# Altium PCB Metis 2023 (PCB) - Shasi.PcbDoc
Units mm, origin at the board's own origin, x right, y up, seen from the top; angles counter-clockwise.
Board outline 180.8 x 171.08 mm, 2 copper layers (Top Layer, Bottom Layer); 98 components, 39 nets, 279 pads, 7 vias.
Unrouted connection lines stored in the file: 16.
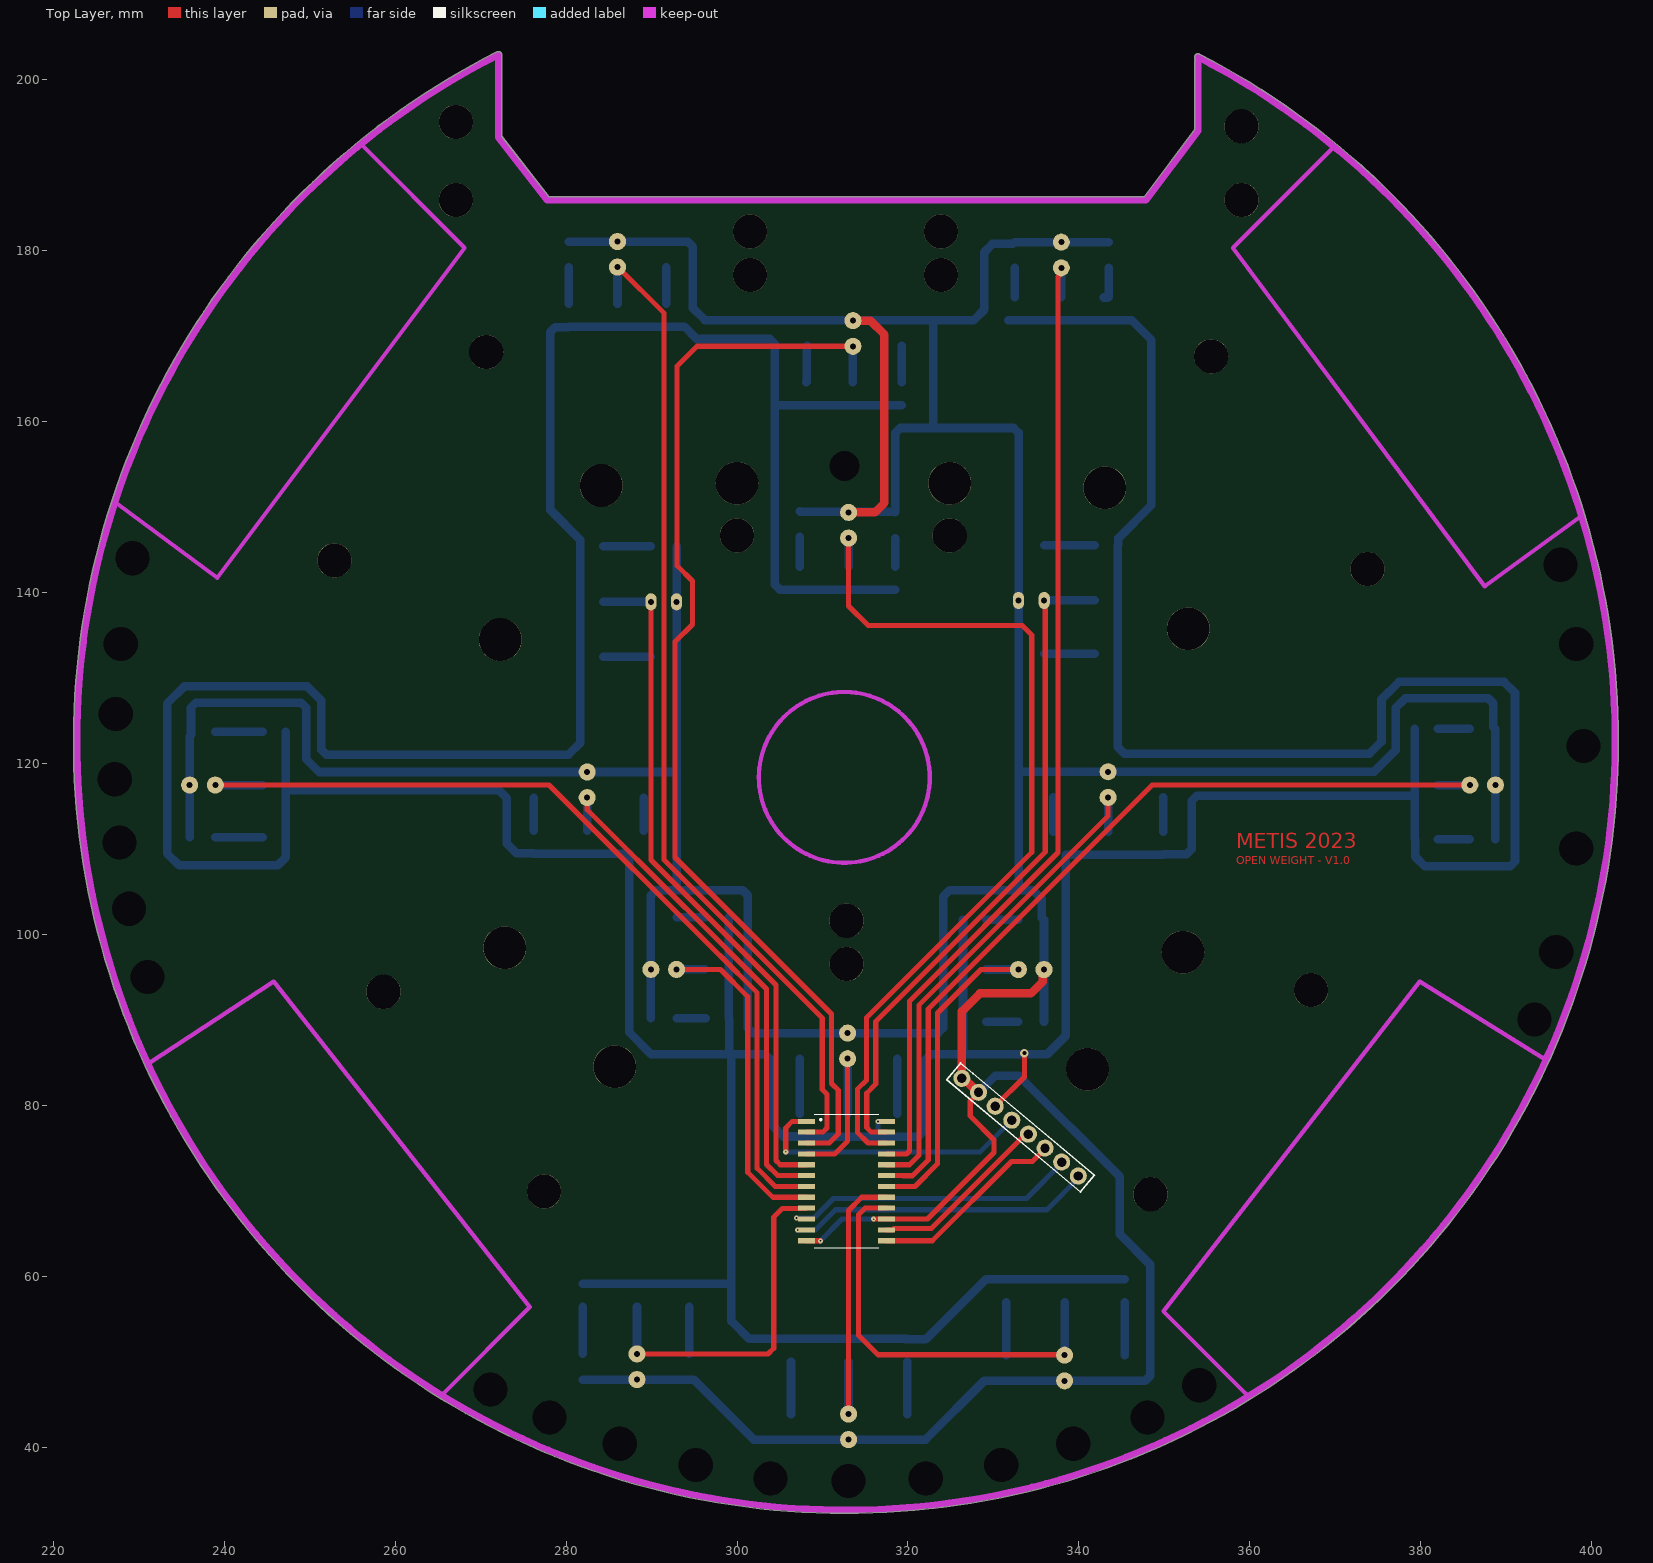
[diagram p0: Top Layer view]
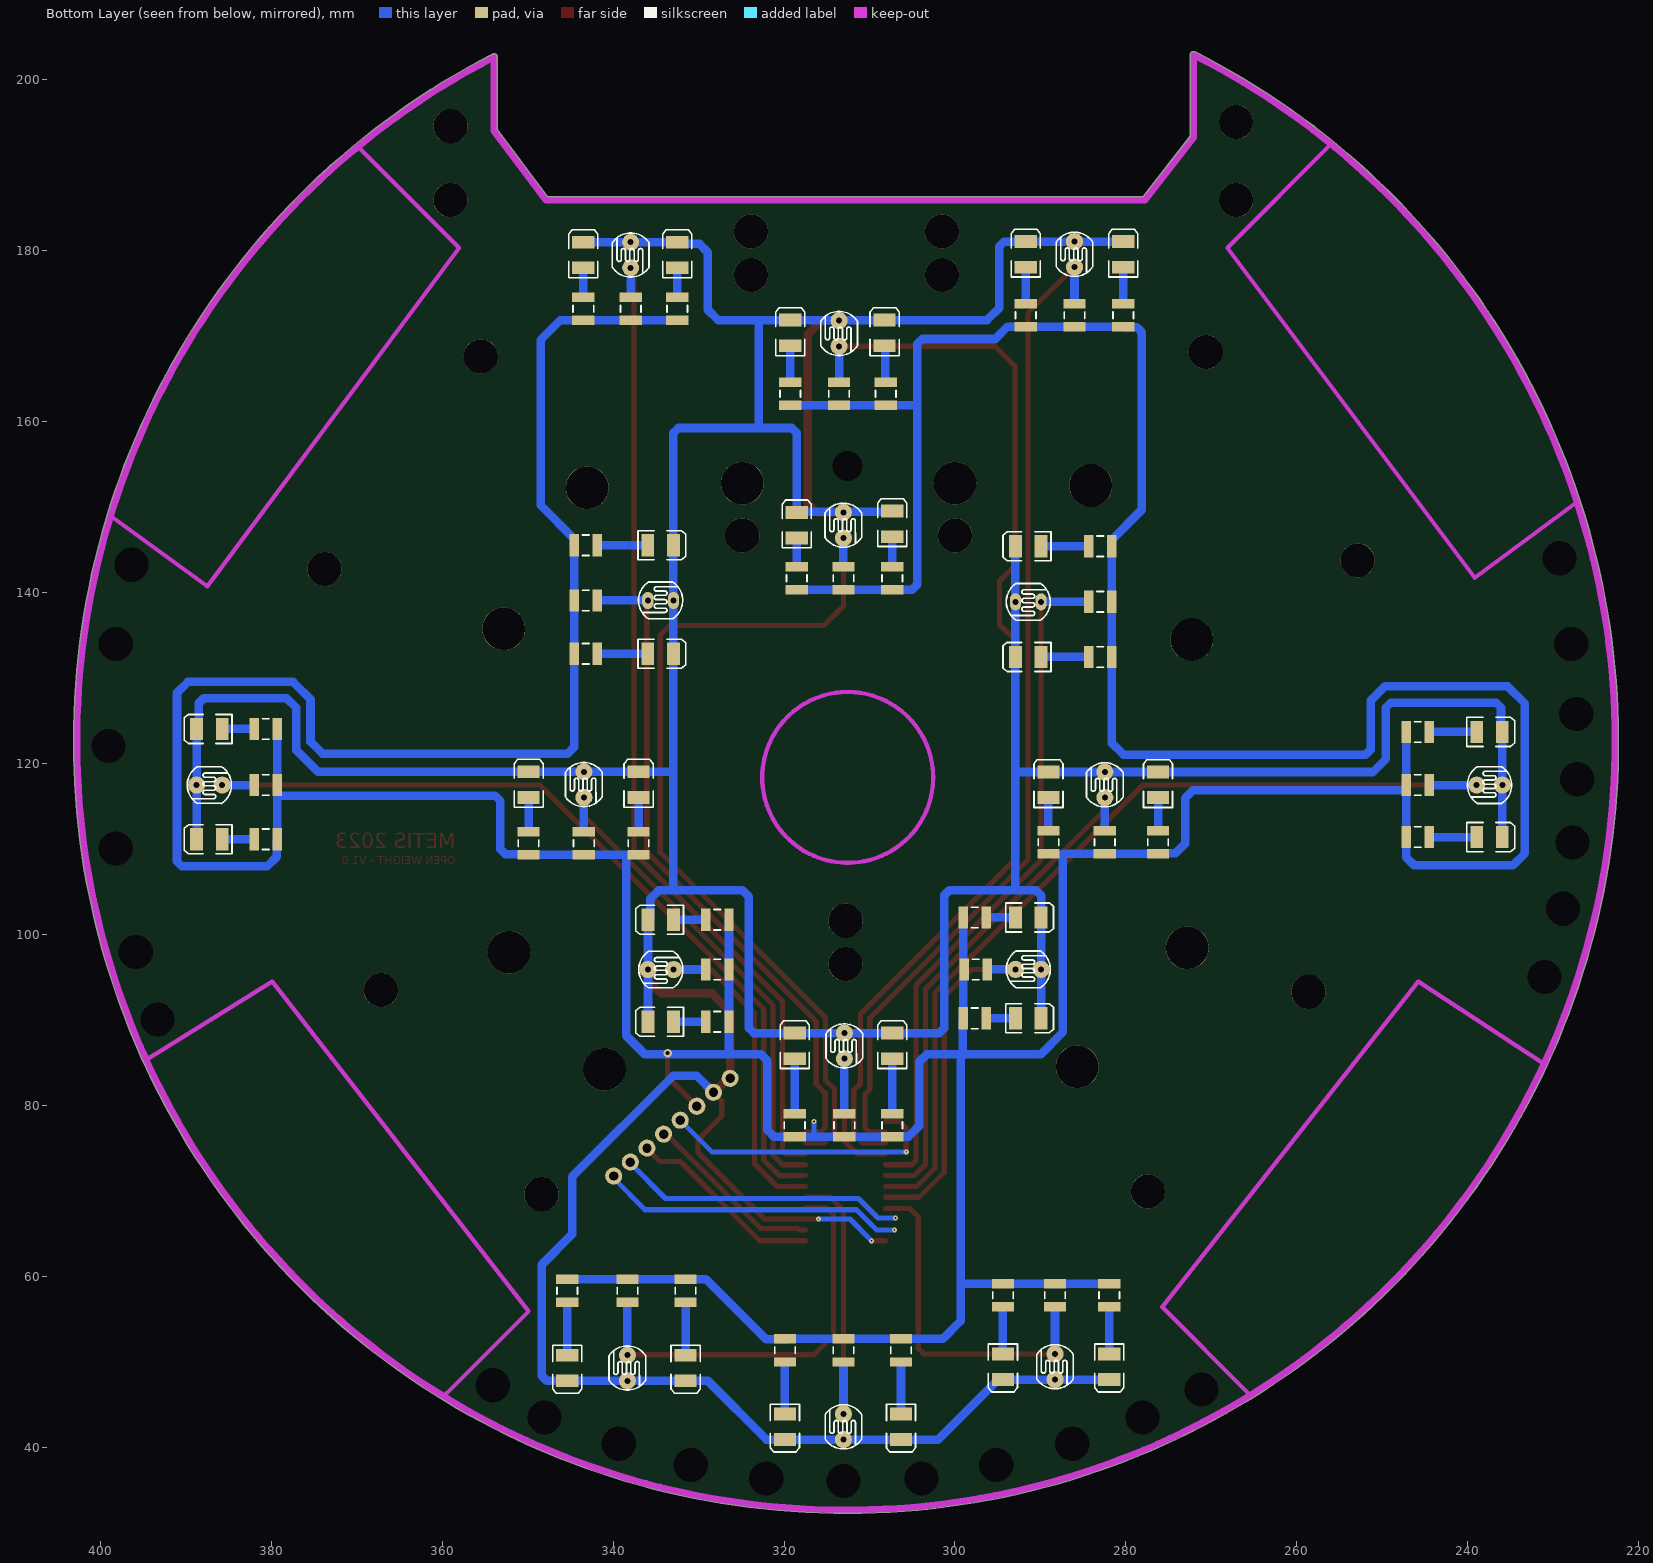
[diagram p1: Bottom Layer view, seen from below]

## Layer stack, top to bottom
Top Solder: solder mask 0.0102, Solder Resist, Dk 3.5
Top Layer: signal copper 0.0356
Dielectric 1: dielectric 0.32, FR-4, Dk 4.8
Bottom Layer: signal copper 0.0356
Bottom Solder: solder mask 0.0102, Solder Resist, Dk 3.5

## Board outline
272.463,193.399 277.959,186.328 347.667,186.328 353.563,194.189 353.563,202.184 cw(c353.963,202.184) 353.628,202.403 cw(c353.942,202.651) 354.126,203.007 cw(c312.745,122.634) 403.145,122.634 cw(c312.745,122.634) 271.88,203.27 cw(c272.062,202.914) 272.463,202.914

## Design rules (kind name [scope] priority, off if disabled: settings)
Clearance [All] p1: gap=0.254 ignorepadtopadclearanceinfootprint=FALSE except(0: Arc-Hole Track-Hole SMDPad-Hole THPad-Hole Via-Hole Fill-Hole Poly-Hole Region-Hole Text-Hole; 0.1: Arc-Via Track-Via; 0.5: Arc-Arc Arc-Track Arc-SMDPad Arc-THPad Arc-Fill Arc-Poly Arc-Region Arc-Text Track-Track Track-SMDPad Track-THPad Track-Fill Track-Poly Track-Region Track-Text)
PolygonConnect [All] p1: connectstyle=Relief reliefconductorwidth=0.254 reliefentries=4 polygonreliefangle="90 Angle" airgapwidth=0.254
RoutingVias [All] p1: holewidth=0.711 width=1.27 viastyle="Through Hole" minholewidth=0.1 minwidth=0.1 maxholewidth=10 maxwidth=10
SolderMaskExpansion [All] p1: expansion=0.102 istentingtop=FALSE
Width [All] p1: maxlimit=10 minlimit=0.1 preferedwidth=0.254
30 further rules are at their usual default settings.

## Classes and differential pairs
component class "Metis 2023 (Schematic) - Shasi": R2 R4 R5 R6 R7 R9 R10 R11 R12 R13 R15 R16 R17 R18 R19 R20 R21 R22 R23 R24 R25 R26 R27 R28 R29 R30 R31 R32

## Components (designator, comment, footprint, x,y, rotation, side; value= is the part's Value field where it differs from the comment)
* "" "HEADER 8" 326.308,83.148 r320 top
LED1 "" MY_LED_SMD 281.94,49.403 r270 bottom
LED1 "" MY_LED_SMD 294.386,49.403 r270 bottom
LED2 "" MY_LED_SMD 319.898,42.367 r270 bottom
LED2 "" MY_LED_SMD 306.309,42.367 r270 bottom
LED3 "" MY_LED_SMD 345.359,49.252 r270 bottom
LED3 "" MY_LED_SMD 331.516,49.252 r270 bottom
LED4 "" MY_LED_SMD 387.247,124.037 r0 bottom
LED4 "" MY_LED_SMD 387.247,111.135 r0 bottom
LED5 "" MY_LED_SMD 332.486,179.502 r90 bottom
LED5 "" MY_LED_SMD 343.481,179.502 r90 bottom
LED6 "" MY_LED_SMD 308.229,170.378 r90 bottom
LED6 "" MY_LED_SMD 319.278,170.378 r90 bottom
LED7 "" MY_LED_SMD 291.719,179.578 r90 bottom
LED7 "" MY_LED_SMD 280.289,179.578 r90 bottom
LED8 "" MY_LED_SMD 237.439,123.693 r180 bottom
LED8 "" MY_LED_SMD 237.439,111.379 r180 bottom
LED9 "" MY_LED_SMD 307.325,86.946 r90 bottom
LED9 "" MY_LED_SMD 318.755,86.946 r90 bottom
LED10 "" MY_LED_SMD 337.017,117.526 r90 bottom
LED10 "" MY_LED_SMD 349.885,117.526 r90 bottom
LED11 "" MY_LED_SMD 334.44,132.842 r180 bottom
LED11 "" MY_LED_SMD 334.44,145.542 r180 bottom
LED12 "" MY_LED_SMD 291.414,101.981 r180 bottom
LED12 "" MY_LED_SMD 291.414,90.17 r180 bottom
LED13 "" MY_LED_SMD 291.416,132.461 r0 bottom
LED13 "" MY_LED_SMD 291.416,145.415 r0 bottom
LED14 "" MY_LED_SMD 334.415,101.712 r0 bottom
LED14 "" MY_LED_SMD 334.415,89.774 r0 bottom
LED15 "" MY_LED_SMD 307.34,148.039 r90 bottom
LED15 "" MY_LED_SMD 318.516,147.879 r90 bottom
LED16 "" MY_LED_SMD 289.052,117.499 r90 bottom
LED16 "" MY_LED_SMD 276.225,117.499 r90 bottom
R1 "" MY_RES_SMD_1206 281.94,57.785 r270 bottom
R1 "" MY_RES_SMD_1206 294.386,57.785 r270 bottom
R2 "" MY_RES_SMD_1206 245.825,117.475 r180 bottom
R3 "" MY_RES_SMD_1206 319.898,51.308 r270 bottom
R3 "" MY_RES_SMD_1206 306.309,51.308 r270 bottom
R4 "" MY_RES_SMD_1206 286.004,172.466 r90 bottom
R5 "" MY_RES_SMD_1206 345.359,58.293 r270 bottom
R5 "" MY_RES_SMD_1206 331.516,58.293 r270 bottom
R6 "" MY_RES_SMD_1206 313.558,163.281 r90 bottom
R7 "" MY_RES_SMD_1206 380.666,124.037 r0 bottom
R7 "" MY_RES_SMD_1206 380.666,111.135 r0 bottom
R8 "" MY_RES_SMD_1206 337.942,173.228 r90 bottom
R9 "" MY_RES_SMD_1206 332.486,173.228 r90 bottom
R9 "" MY_RES_SMD_1206 343.481,173.228 r90 bottom
R10 "" MY_RES_SMD_1206 380.666,117.475 r0 bottom
R11 "" MY_RES_SMD_1206 308.102,163.281 r90 bottom
R11 "" MY_RES_SMD_1206 319.278,163.281 r90 bottom
R12 "" MY_RES_SMD_1206 338.328,58.293 r270 bottom
R13 "" MY_RES_SMD_1206 291.719,172.466 r90 bottom
R13 "" MY_RES_SMD_1206 280.289,172.466 r90 bottom
R14 "" MY_RES_SMD_1206 313.04,51.308 r270 bottom
R15 "" MY_RES_SMD_1206 245.825,123.693 r180 bottom
R15 "" MY_RES_SMD_1206 245.825,111.379 r180 bottom
R16 "" MY_RES_SMD_1206 288.285,57.785 r270 bottom
R17 "" MY_RES_SMD_1206 307.325,77.644 r90 bottom
R17 "" MY_RES_SMD_1206 318.755,77.644 r90 bottom
R18 "" MY_RES_SMD_1206 313.05,141.685 r90 bottom
R19 "" MY_RES_SMD_1206 337.017,110.664 r90 bottom
R19 "" MY_RES_SMD_1206 349.885,110.664 r90 bottom
R20 "" MY_RES_SMD_1206 283.003,138.918 r0 bottom
R21 "" MY_RES_SMD_1206 343.201,132.842 r180 bottom
R21 "" MY_RES_SMD_1206 343.201,145.542 r180 bottom
R22 "" MY_RES_SMD_1206 282.458,110.791 r90 bottom
R23 "" MY_RES_SMD_1206 297.688,101.981 r180 bottom
R23 "" MY_RES_SMD_1206 297.688,90.17 r180 bottom
R24 "" MY_RES_SMD_1206 297.561,95.9 r180 bottom
R25 "" MY_RES_SMD_1206 283.003,132.461 r0 bottom
R25 "" MY_RES_SMD_1206 283.003,145.415 r0 bottom
R26 "" MY_RES_SMD_1206 312.938,77.644 r90 bottom
R27 "" MY_RES_SMD_1206 327.787,101.712 r0 bottom
R27 "" MY_RES_SMD_1206 327.787,89.774 r0 bottom
R28 "" MY_RES_SMD_1206 327.787,95.885 r0 bottom
R29 "" MY_RES_SMD_1206 307.34,141.685 r90 bottom
R29 "" MY_RES_SMD_1206 318.516,141.685 r90 bottom
R30 "" MY_RES_SMD_1206 343.423,110.664 r90 bottom
R31 "" MY_RES_SMD_1206 289.052,110.791 r90 bottom
R31 "" MY_RES_SMD_1206 276.225,110.791 r90 bottom
R32 "" MY_RES_SMD_1206 343.201,139.075 r180 bottom
U1 "" *SOIC-24_74HC4067(Primary) 312.801,71.12 r0 top locked
? "" PhotoCell#1 288.285,49.403 r90 bottom
? "" PhotoCell#1 313.04,42.367 r90 bottom
? "" PhotoCell#1 338.328,49.252 r90 bottom
? "" PhotoCell#1 387.247,117.475 r0 bottom
? "" PhotoCell#1 237.439,117.475 r180 bottom
? "" PhotoCell#1 282.458,117.499 r90 bottom
? "" PhotoCell#1 291.414,95.9 r180 bottom
? "" PhotoCell#1 312.938,86.946 r90 bottom
? "" PhotoCell#1 334.415,95.885 r0 bottom
? "" PhotoCell#1 343.423,117.526 r90 bottom
? "" PhotoCell#2 334.44,139.075 r180 bottom
? "" PhotoCell#2 291.416,138.918 r0 bottom
? "" PhotoCell#1 337.942,179.502 r90 bottom
? "" PhotoCell#1 313.05,147.879 r90 bottom
? "" PhotoCell#1 313.558,170.317 r90 bottom
? "" PhotoCell#1 286.004,179.578 r90 bottom

## Footprints (in the part's own frame and the unit in brackets; to place one, negate y for a bottom-side part, rotate by r counter-clockwise, add the part's x,y. Pads: shape width x height; smd on the part's side, far side on the other; paste and mask are expansions set on the pad)
*SOIC-24_74HC4067(Primary) [mm]
  rect 2x0.6 smd: P1(-4.7,7) P2(-4.7,5.73) P3(-4.7,4.46) P4(-4.7,3.19) P5(-4.7,1.92) P6(-4.7,0.65) P7(-4.7,-0.62) P8(-4.7,-1.89) P9(-4.7,-3.16) P10(-4.7,-4.43) P11(-4.7,-5.7) P12(-4.7,-6.97) P13(4.7,-6.97) P14(4.7,-5.7) P15(4.7,-4.43) P16(4.7,-3.16) P17(4.7,-1.89) P18(4.7,-0.62) P19(4.7,0.65) P20(4.7,1.92) P21(4.7,3.19) P22(4.7,4.46) P23(4.7,5.73) P24(4.7,7)
  silkscreen extent -3.8,-7.8 3.8,7.8
"HEADER 8" [mm]
  round 2 hole 1.1: 1(0,0) 2(2.54,0) 3(5.08,0) 4(7.62,0) 5(10.16,0) 6(12.7,0) 7(15.24,0) 8(17.78,0)
  silkscreen extent -1.27,-1.27 19.18,1.27
MY_LED_SMD [mm]
  rect 1.5x2.6 smd: 1(-1.5,0) 2(1.5,0)
  silkscreen extent -2.65,-1.7 2.95,1.7, body extent -1.51,-0.8 1.71,0.8, height 1.1
MY_RES_SMD_1206 [mm]
  rect 1.1x2.6 smd: 1(-1.35,0) 2(1.35,0)
  silkscreen extent -0.4,-1.2 0.4,1.2, body extent -1.52,-0.76 1.68,0.84, height 0.55
PhotoCell#1 [mm]
  round 2 hole 0.7: 1(-1.5,0) 2(1.5,0)
  silkscreen extent -2.58,-2.15 2.58,2.15, body extent -2.61,-2.16 2.61,2.14, height 2.44
PhotoCell#2 [mm]
  oval 1.3x2 hole 0.7: 1(-1.5,0) 2(1.5,0)
  silkscreen extent -2.58,-2.15 2.58,2.15, body extent -2.61,-2.16 2.61,2.14, height 2.44

## Part data
*: library part "Header 8"
LED1 LED1 LED2 LED2 LED3 LED3 LED4 LED4 LED5 LED5 LED6 LED6 LED7 LED7 LED8 LED8 LED9 LED9 LED10 LED10 LED11 LED11 LED12 LED12 LED13 LED13 LED14 LED14 LED15 LED15 LED16 LED16: library part "LED SMD"
R1 R1 R2 R3 R3 R4 R5 R5 R6 R7 R7 R8 R9 R9 R10 R11 R11 R12 R13 R13 R14 R15 R15 R16 R17 R17 R18 R19 R19 R20 R21 R21 R22 R23 R23 R24 R25 R25 R26 R27 R27 R28 R29 R29 R30 R31 R31 R32: library part "RES SMD 1206"
U1: library part 74HC4067, "Analog Switch/Analog Multiplexer Single 16:1 24-Pin SSOP T/R", Package=None, Availability="Not in stock", Check_prices=https://www.snapeda.com/parts/74HC4067/Nexperia/view-part/?ref=eda, MF=Nexperia, MP=74HC4067, Price=None, SnapEDA_Link=https://www.snapeda.com/parts/74HC4067/Nexperia/view-part/?ref=snap

## Free pads (board coordinates)
  round 0 hole 4: 1(227.161,118.156) 1(227.288,125.776) 1(227.711,110.744) 1(227.872,133.996) 1(228.854,102.997) 1(229.235,144.018) 1(231.013,94.996) 1(271.145,46.736) 1(278.056,43.462) 1(286.258,40.386) 1(295.155,37.906) 1(303.911,36.322) 1(313.035,36.027) 1(322.072,36.322) 1(330.915,37.906) 1(339.344,40.386) 1(348.014,43.462) 1(354.076,47.244) 1(393.319,90.043) 1(395.859,97.917) 1(396.367,143.256) 1(398.198,110.058) 1(398.198,133.996) 1(399.035,122.027)
  round 0 hole 3.5: 3(312.547,154.813)
  round 5 hole 5: 55(341.009,84.201) 74(272.81,98.425) 75(352.806,135.763) 76(285.674,84.515) 84(272.288,134.493) 91(343.027,152.273) 92(284.099,152.527) 100(352.185,97.917) 109(324.88,152.781) 110(299.988,152.781)
  round 4 hole 4: 60(258.624,93.279) 63(324.88,146.685) 64(299.988,146.685) 65(323.864,177.165) 66(301.512,177.165) 78(252.871,143.764) 79(355.487,167.64) 80(277.42,69.911) 81(348.375,69.596) 82(373.775,142.748) 83(367.171,93.472) 85(270.651,168.148) 86(267.095,185.928) 90(359.043,185.928) 111(323.864,182.245) 112(312.815,96.52) 113(312.815,101.6) 116(359.043,194.564) 117(301.512,182.245) 118(267.095,195.072)

## Via types
v1: diameter 0.6, hole 0.2, Top Layer to Bottom Layer, 6 vias
v2: diameter 1, hole 0.5, Top Layer to Bottom Layer, 1 vias

## Nets (pads, with @x,y where several pads share a name; then routed paths per layer and width w, separated by ;. In a path a pad name is that pad's centre, name@x,y a point inside that pad or via, vN(x,y) a via of type N, cw(c..) or ccw(c..) an arc to the next point about the centre after c; other vN are vias at no path point)
ADD0: *.7 U1.P10 | length 33.9
  Bottom Layer w0.6: v1(306.943,66.818) 309.007,66.818 311.277,69.088 333.853,69.088 *.7@338.118,73.352
ADD1: *.8 U1.P11 | length 35.6
  Bottom Layer w0.6: v1(307.086,65.405) 309.15,65.405 311.52,67.775 336.253,67.775 *.8@340.106,71.628
ADD2: *.5 U1.P14 | length 21.2
  Top Layer w0.6: U1.P14 318.201,65.42 318.371,65.59 322.733,65.59 333.761,76.618 *.5
ADD3: *.6 U1.P13 | length 23.1
  Top Layer w0.6: U1.P13 322.849,64.15 332.105,73.406 334.553,73.406 *.6@336.132,74.985
GND: *.1 *.2 ?.1@288.285,47.903 ?.1@313.04,40.867 ?.1@338.328,47.752 ?.2@235.939,117.475 ?.2@282.458,118.999 ?.2@286.004,181.078 ?.2@289.914,95.9 ?.2@292.916,138.918 ?.2@312.938,88.446 ?.2@313.05,149.379 ?.2@313.558,171.817 ?.2@332.94,139.075 ?.2@335.915,95.885 ?.2@337.942,181.002 ?.2@343.423,119.026 ?.2@388.747,117.475 LED1.2 LED2.2 LED3.2 LED4.2 LED5.2 LED6.2 LED7.2 LED8.2 LED9.2 LED10.2 LED11.2 LED12.2 LED13.2 LED14.2 LED15.2 LED16.2 U1.P12 U1.P15 | length 691.4
  Top Layer w0.6: U1.P12 309.738,64.15 v1(309.753,64.135) ; v1(315.976,66.675) 315.991,66.69 U1.P15 322.278,66.69 330.073,74.485 330.073,75.946 327.279,78.74 327.279,80.464 328.254,81.439 *.2
  Top Layer w1: ?.2@313.05,149.379 316.13,149.379 317.246,150.495 317.246,170.18 315.609,171.817 ?.2@313.558,171.817 ; *.1 *.1@326.308,83.373 ; *.2@327.93,81.751 *.1@326.308,83.373 ; ?.2@335.915,95.885 335.782,95.752 335.782,94.482 334.391,93.091 328.422,93.091 326.308,90.977 *.1@326.308,83.373
  Bottom Layer w0.6: v1(309.753,64.135) 312.293,66.675 v1(315.976,66.675)
  Bottom Layer w1: LED8.2@235.939,111.379 235.939,123.19 236.093,123.344 236.093,126.541 236.679,127.127 248.969,127.127 249.555,126.541 249.555,120.523 251.079,118.999 276.225,118.999 282.458,118.999 289.052,118.999 292.916,118.999 ; LED7.2@280.289,181.078 286.004,181.078 291.719,181.078 294.235,181.078 294.821,180.492 294.821,173.301 296.244,171.878 308.229,171.878 319.278,171.878 322.961,171.878 ; LED1.2@281.94,47.903 288.285,47.903 294.386,47.903 294.936,47.903 301.972,40.867 306.309,40.867 319.898,40.867 319.91,40.879 322.057,40.879 328.93,47.752 331.516,47.752 338.328,47.752 345.359,47.752 347.775,47.752 348.361,48.338 348.361,61.341 344.805,64.897 344.805,71.628 332.994,83.439 330.2,83.439 *.2@328.041,81.28 ; LED12.2@289.914,90.17 289.914,101.981 289.914,104.57 290.5,105.156 292.916,105.156 ; LED13.2@292.916,145.415 292.916,138.918 292.916,132.461 292.916,118.999 ; LED15.2@307.34,149.539 307.42,149.459 318.436,149.459 318.516,149.379 318.516,158.672 319.102,159.258 322.961,159.258 ; LED14.2@335.915,89.774 335.915,101.712 335.665,101.962 335.665,104.136 334.645,105.156 332.94,105.156 ; LED5.2@343.481,181.002 337.942,181.002 332.486,181.002 332.276,180.792 329.89,180.792 328.93,179.832 328.93,173.101 327.707,171.878 322.961,171.878 ; LED4.2@388.747,111.135 388.747,124.037 388.497,124.287 388.497,127.049 387.911,127.635 378.206,127.635 377.063,126.492 377.063,121.539 374.55,119.026 349.885,119.026 343.423,119.026 337.017,119.026 333.169,119.026 332.94,119.255 ; 292.916,105.156 300.658,105.156 301.244,104.57 301.244,89.032 301.83,88.446 307.325,88.446 312.938,88.446 318.755,88.446 323.518,88.446 324.104,89.032 324.104,104.394 324.866,105.156 332.94,105.156 ; 292.916,105.156 292.916,118.999 ; 322.961,159.258 332.354,159.258 332.94,158.672 332.94,145.542 332.94,132.842 332.94,119.255 ; 322.961,159.258 322.961,171.878 ; 332.94,105.156 332.94,119.255
NetLED1_1: LED1.1 R1.2 | length 11.1
  Bottom Layer w1: LED1.1@281.94,50.903 R1.2@281.94,56.435 ; LED1.1@294.386,50.903 R1.2@294.386,56.435
NetLED2_1: LED2.1 R3.2 | length 12.2
  Bottom Layer w1: LED2.1@306.309,43.867 R3.2@306.309,49.958 ; LED2.1@319.898,43.867 R3.2@319.898,49.958
NetLED3_1: LED3.1 R5.2 | length 12.4
  Bottom Layer w1: LED3.1@331.516,50.752 R5.2@331.516,56.943 ; LED3.1@345.359,50.752 R5.2@345.359,56.943
NetLED4_1: LED4.1 R7.2 | length 7.5
  Bottom Layer w1: R7.2@382.016,111.135 LED4.1@385.747,111.135 ; R7.2@382.016,124.037 LED4.1@385.747,124.037
NetLED5_1: LED5.1 R9.2 | length 8
  Bottom Layer w1: R9.2@332.486,174.578 LED5.1@332.486,178.002 ; R9.2@343.481,174.578 R9.2@343.431,174.578 ; LED5.1@343.481,178.002 343.481,174.628 R9.2@343.431,174.578 ; R9.2@343.431,174.578 343.381,174.528 342.9,174.528 342.95,174.578 R9.2@343.431,174.578
NetLED6_1: LED6.1 R11.2 | length 8.6
  Bottom Layer w1: R11.2@308.102,164.631 308.116,164.631 308.166,164.681 308.166,168.814 LED6.1@308.229,168.878 ; R11.2@319.278,164.631 LED6.1@319.278,168.878
NetLED7_1: LED7.1 R13.2 | length 8.5
  Bottom Layer w1: R13.2@280.289,173.816 LED7.1@280.289,178.078 ; R13.2@291.719,173.816 LED7.1@291.719,178.078
NetLED8_1: LED8.1 R15.2 | length 11.1
  Bottom Layer w1: LED8.1@238.939,111.379 R15.2@244.475,111.379 ; LED8.1@238.939,123.693 R15.2@244.475,123.693
NetLED9_1: LED9.1 R17.2 | length 12.9
  Bottom Layer w1: R17.2@307.325,78.994 LED9.1@307.325,85.446 ; R17.2@318.755,78.994 LED9.1@318.755,85.446
NetLED10_1: LED10.1 R19.2 | length 8
  Bottom Layer w1: R19.2@337.017,112.014 LED10.1@337.017,116.026 ; R19.2@349.885,112.014 LED10.1@349.885,116.026
NetLED11_1: LED11.1 R21.2 | length 11.8
  Bottom Layer w1: LED11.1@335.94,132.842 R21.2@341.851,132.842 ; LED11.1@335.94,145.542 R21.2@341.851,145.542
NetLED12_1: LED12.1 R23.2 | length 6.8
  Bottom Layer w1: LED12.1@292.914,90.17 R23.2@296.338,90.17 ; LED12.1@292.914,101.981 R23.2@296.338,101.981
NetLED13_1: LED13.1 R25.2 | length 11.1
  Bottom Layer w1: R25.2@284.353,132.461 LED13.1@289.916,132.461 ; R25.2@284.353,145.415 LED13.1@289.916,145.415
NetLED14_1: LED14.1 R27.2 | length 7.6
  Bottom Layer w1: R27.2@329.137,89.774 LED14.1@332.915,89.774 ; R27.2@329.137,101.712 LED14.1@332.915,101.712
NetLED15_1: LED15.1 R29.2 | length 6.8
  Bottom Layer w1: R29.2@307.34,143.035 LED15.1@307.34,146.539 ; R29.2@318.516,143.035 LED15.1@318.516,146.379
NetLED16_1: LED16.1 R31.2 | length 7.7
  Bottom Layer w1: R31.2@276.225,112.141 LED16.1@276.225,115.999 ; R31.2@289.052,112.141 LED16.1@289.052,115.999
Out: *.4 U1.P1 | length 33.5
  Top Layer w0.6: v1(305.689,74.549) 305.689,77.343 306.466,78.12 U1.P1
  Bottom Layer w0.6: v1(305.689,74.549) 328.444,74.549 *.4
S0: ?.2@288.285,50.903 R16.2 U1.P9 | length 41.4
  Top Layer w0.6: ?.2@288.285,50.903 303.633,50.903 304.292,51.562 304.292,66.929 305.293,67.93 U1.P9@308.101,67.93
  Bottom Layer w1: ?.2@288.285,50.903 R16.2
S1: ?.1@292.914,95.9 R24.2 U1.P8 | length 41.6
  Top Layer w0.6: ?.1@292.914,95.9 298.054,95.9 301.246,92.708 301.246,72.166 304.182,69.23 U1.P8
  Bottom Layer w1: ?.1@292.914,95.9 R24.2
S2: ?.1@238.939,117.475 R2.2 U1.P7 | length 106.2
  Top Layer w0.6: ?.1@238.939,117.475 278.003,117.475 297.905,97.573 297.936,97.573 302.346,93.164 302.346,72.622 304.468,70.5 U1.P7
  Bottom Layer w1: ?.1@238.939,117.475 R2.2
S3: ?.1@282.458,115.999 R22.2 U1.P6 | length 60.7
  Top Layer w0.6: ?.1@282.458,115.999 282.458,114.576 293.951,103.083 293.983,103.083 303.446,93.619 303.446,73.077 304.753,71.77 U1.P6
  Bottom Layer w1: R22.2 ?.1@282.458,115.999
S4: ?.1@289.916,138.918 R20.2 U1.P5 | length 80.8
  Top Layer w0.6: ?.1@289.916,138.918 289.916,108.705 304.546,94.075 304.546,73.533 305.039,73.04 U1.P5
  Bottom Layer w1: R20.2 ?.1@289.916,138.918
S5: ?.1@312.938,85.446 R26.2 U1.P4 | length 21.5
  Top Layer w0.6: U1.P4 311.419,74.31 312.938,75.829 ?.1@312.938,85.446
  Bottom Layer w1: R26.2 ?.1@312.938,85.446
S6: ?.1@313.558,168.817 R6.2 U1.P3 | length 129.2
  Top Layer w0.6: U1.P3 310.784,75.58 311.838,76.634 311.838,81.774 311.062,82.55 311.062,90.67 292.735,108.997 292.735,134.239 294.767,136.271 294.767,141.351 292.989,143.129 292.989,166.497 295.309,168.817 ?.1@313.558,168.817
  Bottom Layer w1: R6.2 ?.1@313.558,168.817
S7: ?.1@286.004,178.078 R4.2 U1.P2 | length 117.8
  Top Layer w0.6: ?.1@286.004,178.078 286.067,178.078 291.465,172.681 291.465,108.712 309.962,90.215 309.962,81.833 310.515,81.28 310.515,77.343 310.022,76.85 U1.P2
  Bottom Layer w1: R4.2 ?.1@286.004,178.078
S8: ?.1@335.94,139.075 R32.2 U1.P23 | length 78.9
  Top Layer w0.6: U1.P23 315.707,76.85 315.171,77.386 315.171,81.418 316.23,82.477 316.23,89.789 336.068,109.627 336.068,138.947 ?.1@335.94,139.075
  Bottom Layer w1: ?.1@335.94,139.075 R32.2
S9: ?.1@313.05,146.379 R18.2 U1.P22 | length 104.7
  Top Layer w0.6: ?.1@313.05,146.379 313.05,138.435 315.341,136.144 333.375,136.144 334.49,135.029 334.49,109.604 315.13,90.244 315.13,82.932 314.071,81.873 314.071,76.835 315.326,75.58 U1.P22
  Bottom Layer w1: R18.2 ?.1@313.05,146.379
S10: ?.1@337.942,178.002 R8.2 U1.P21 | length 116.9
  Top Layer w0.6: U1.P21 319.816,74.31 320.167,74.661 320.167,92.17 337.566,109.569 337.566,176.951 337.674,177.059 337.674,177.734 ?.1@337.942,178.002
  Bottom Layer w1: R8.2 ?.1@337.942,178.002
S11: ?.1@343.423,116.026 R30.2 U1.P20 | length 59.3
  Top Layer w0.6: U1.P20 320.182,73.04 321.267,74.125 321.267,91.714 343.423,113.87 ?.1@343.423,116.026
  Bottom Layer w1: R30.2 ?.1@343.423,116.026
S12: ?.1@385.747,117.475 R10.2 U1.P19 | length 101.3
  Top Layer w0.6: U1.P19 319.431,71.77 319.446,71.755 320.516,71.755 322.367,73.606 322.367,91.259 348.583,117.475 ?.1@385.747,117.475
  Bottom Layer w1: R10.2 ?.1@385.747,117.475
S13: ?.1@332.915,95.885 R28.2 U1.P18 | length 40
  Top Layer w0.6: U1.P18 320.817,70.5 323.467,73.15 323.467,90.803 328.549,95.885 ?.1@332.915,95.885
  Bottom Layer w1: R28.2 ?.1@332.915,95.885
S14: ?.2@313.04,43.867 R14.2 U1.P17 | length 35
  Top Layer w0.6: ?.2@313.04,43.867 313.04,67.676 314.594,69.23 U1.P17
  Bottom Layer w1: ?.2@313.04,43.867 R14.2
S15: ?.2@338.328,50.752 R12.2 U1.P16 | length 48.7
  Top Layer w0.6: U1.P16 314.975,67.96 314.198,67.183 314.198,53.086 316.484,50.8 ?.2@338.074,50.8
  Bottom Layer w1: ?.2@338.328,50.752 R12.2
VCC: *.3 R1.1 R2.1 R3.1 R4.1 R5.1 R6.1 R7.1 R8.1 R9.1 R10.1 R11.1 R12.1 R13.1 R14.1 R15.1 R16.1 R17.1 R18.1 R19.1 R20.1 R21.1 R22.1 R23.1 R24.1 R25.1 R26.1 R27.1 R28.1 R29.1 R30.1 R31.1 R32.1 U1.P24 | length 751.2
  Top Layer w0.61: *.3 333.629,83.312 v2(333.629,86.106)
  Bottom Layer w0.61: 316.484,76.294 v1(316.484,78.105)
  Bottom Layer w1: R15.1@247.175,123.693 R2.1 R2.1@247.175,116.84 ; R1.1@281.94,59.135 R16.1 294.386,59.135 299.259,59.135 299.339,59.055 ; R23.1@299.038,101.981 299.038,90.17 299.088,90.12 299.088,85.982 299.085,85.979 ; 304.425,161.931 R6.1 R11.1@319.278,161.931 ; R29.1@318.516,140.335 R18.1 305.005,140.335 304.419,140.921 304.419,161.925 304.419,169.086 303.833,169.672 295.275,169.672 293.831,171.116 291.719,171.116 R4.1 280.289,171.116 280.239,171.066 278.716,171.066 278.13,170.48 278.13,149.688 281.653,146.165 281.653,145.415 R20.1 281.653,132.461 281.653,122.395 280.289,121.031 251.919,121.031 251.333,121.617 251.333,127.381 249.682,129.032 235.331,129.032 233.299,127 233.299,109.474 234.696,108.077 246.253,108.077 247.175,108.999 247.175,111.379 R2.1@247.175,116.84 ; R3.1@319.659,52.608 322.102,52.608 329.137,59.643 331.516,59.643 R12.1 R5.1@345.359,59.643 ; R3.1@319.898,52.658 R14.1 306.309,52.658 301.418,52.658 299.339,54.737 299.339,59.055 ; R27.1@326.437,101.712 R28.1 326.437,89.774 326.437,86.026 326.39,85.979 ; R9.1@331.736,171.878 332.486,171.878 343.481,171.878 346.155,171.878 348.488,169.545 348.488,150.229 344.601,146.342 344.601,145.592 344.551,145.542 R32.1 344.551,132.842 344.551,121.92 345.313,121.158 374.015,121.158 375.412,122.555 375.412,127.508 377.444,129.54 389.763,129.54 391.033,128.27 391.033,108.536 390.447,107.95 380.492,107.95 379.366,109.076 379.366,111.085 379.316,111.135 R10.1@379.316,116.205 ; R7.1@379.316,124.037 R10.1 R10.1@379.316,116.205 ; R2.1@247.175,116.84 272.161,116.84 273.05,115.951 273.05,110.617 274.176,109.491 276.175,109.491 276.225,109.441 R22.1 287.401,109.441 287.401,88.519 289.941,85.979 299.085,85.979 ; 299.085,85.979 299.339,85.979 ; 299.339,59.055 299.339,85.979 ; 299.339,85.979 303.276,85.979 304.165,85.09 304.165,77.597 305.418,76.344 307.275,76.344 307.325,76.294 R26.1 316.484,76.294 318.755,76.294 321.15,76.294 321.945,77.089 321.945,85.217 322.707,85.979 326.39,85.979 ; 326.39,85.979 333.629,85.979 336.296,85.979 338.455,88.138 338.455,109.314 R30.1 349.885,109.314 349.935,109.364 352.601,109.364 353.187,109.95 353.187,115.619 353.773,116.205 R10.1@379.316,116.205

## Keep-outs
Keep-Out Layer:
  circle w0.5: c312.547,118.364 r10
  lines w0.5: 227.471,150.368 239.155,141.732 268.111,180.34 255.919,192.532 ; 231.027,84.836 245.759,94.488 275.731,56.388 265.571,46.228 ; 359.551,46.228 349.899,55.88 379.871,94.488 394.603,85.344 ; 369.711,192.024 358.027,180.34 387.491,140.716 398.667,148.844
  lines w0.8: 353.942,202.651 cw(c312.745,122.634) 272.062,202.914 272.062,193.262 277.763,185.928 347.867,185.928 353.963,194.056 353.963,202.184

## Other copper
Top Layer:
  text "METIS 2023" at 358.394,109.51 h3
  text "OPEN WEIGHT - V1.0" at 358.394,107.842 h1.6